# Altium PCB CAN Hub1.PcbDoc
Units mil, origin at the board's own origin, x right, y up, seen from the top; angles counter-clockwise.
Board outline 6000 x 4000 mil, 2 copper layers (Top Layer, Bottom Layer); 8 components, 4 nets, 32 pads, 0 vias.
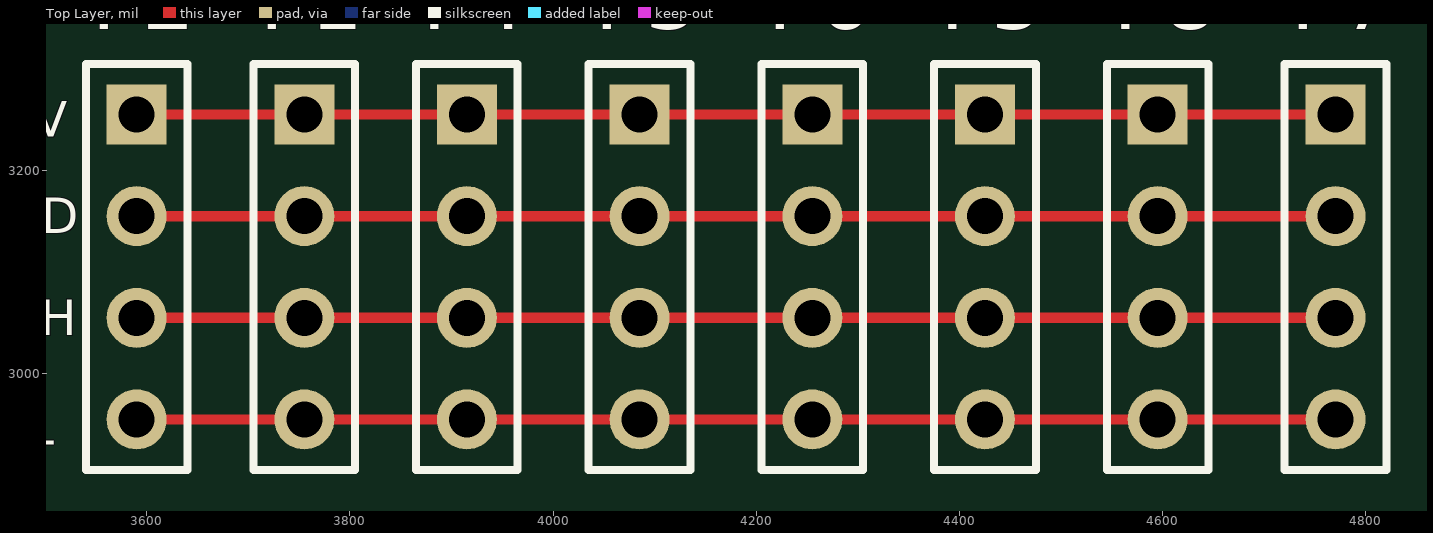
[diagram p0: Top Layer view]
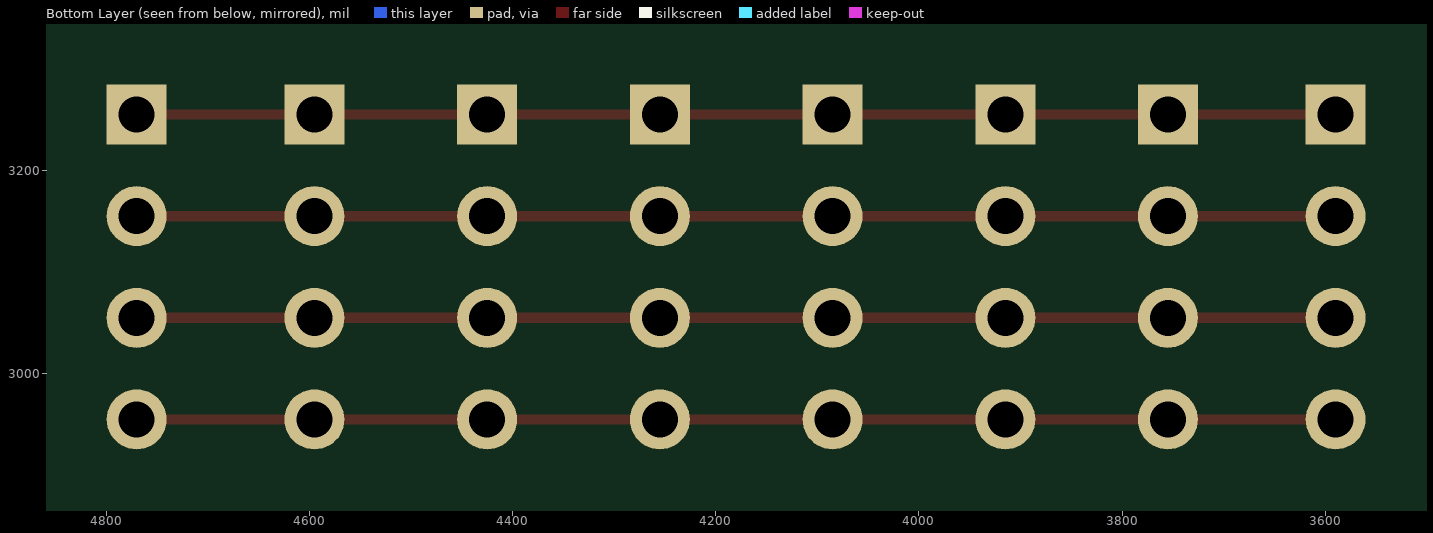
[diagram p1: Bottom Layer view, seen from below]
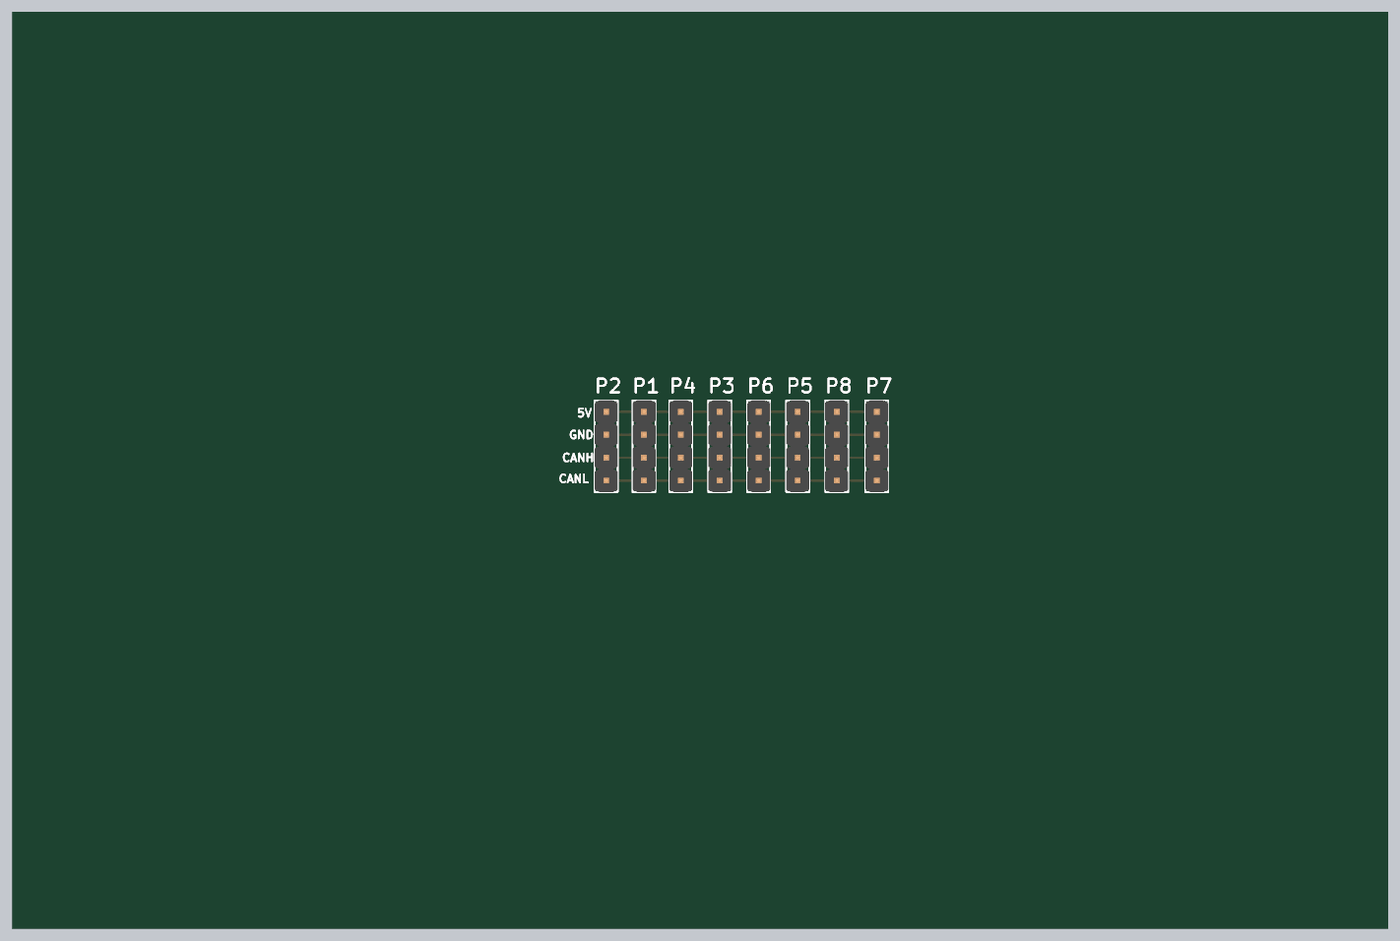
[diagram p2: 3D render of the assembled board from above, using the file's embedded part models]

## Layer stack, top to bottom
Top Solder: solder mask 0.4, Solder Resist, Dk 3.5
Top Layer: signal copper 1.4
Dielectric 1: dielectric 12.6, FR-4, Dk 4.8
Bottom Layer: signal copper 1.4
Bottom Solder: solder mask 0.4, Solder Resist, Dk 3.5

## Board outline
1000,1000 7000,1000 7000,5000 1000,5000

## Design rules (kind name [scope] priority, off if disabled: settings)
Clearance [All] p1: gap=10 ignorepadtopadclearanceinfootprint=FALSE except(0: Arc-Hole Track-Hole SMDPad-Hole THPad-Hole Via-Hole Fill-Hole Poly-Hole Region-Hole Text-Hole)
PolygonConnect [All] p1: connectstyle=Relief reliefconductorwidth=10 reliefentries=4 polygonreliefangle="90 Angle" airgapwidth=10
RoutingVias [All] p1: holewidth=28 width=50 viastyle="Through Hole" minholewidth=28 minwidth=50 maxholewidth=28 maxwidth=50
SolderMaskExpansion [All] p1: expansion=4 istentingtop=FALSE
Width [All] p1: maxlimit=10 minlimit=10 preferedwidth=10
30 further rules are at their usual default settings.

## Components (designator, comment, footprint, x,y, rotation, side; value= is the part's Value field where it differs from the comment)
P1 "1x4 Header" HDR1X4 3755,3255 r270 top
P2 "1x4 Header" HDR1X4 3590,3255 r270 top
P3 "1x4 Header" HDR1X4 4085,3255 r270 top
P4 "1x4 Header" HDR1X4 3915,3255 r270 top
P5 "1x4 Header" HDR1X4 4425,3255 r270 top
P6 "1x4 Header" HDR1X4 4255,3255 r270 top
P7 "1x4 Header" HDR1X4 4770,3255 r270 top
P8 "1x4 Header" HDR1X4 4595,3255 r270 top

## Footprints (in the part's own frame and the unit in brackets; to place one, negate y for a bottom-side part, rotate by r counter-clockwise, add the part's x,y. Pads: shape width x height; smd on the part's side, far side on the other; paste and mask are expansions set on the pad)
HDR1X4 [mm] "Connector; Header; 4 Position"
  rect 1.5x1.5 hole 0.9: 1(0,0)
  round 1.5 hole 0.9: 2(2.54,0) 3(5.08,0) 4(7.62,0)
  silkscreen extent -1.27,-1.27 8.89,1.27, body extent -1.27,-1.27 8.89,1.27, height 8.54

## Part data
P1 P2 P3 P4 P5 P6 P7 P8: "1x4 Pin Header"

## Nets (pads, with @x,y where several pads share a name; then routed paths per layer and width w, separated by ;. In a path a pad name is that pad's centre, name@x,y a point inside that pad or via, vN(x,y) a via of type N, cw(c..) or ccw(c..) an arc to the next point about the centre after c; other vN are vias at no path point)
5V: P1.1 P2.1 P3.1 P4.1 P5.1 P6.1 P7.1 P8.1 | length 1180
  Top Layer w10: P2.1 P1.1 P4.1 P3.1 P6.1 P5.1 P8.1 P7.1
CANH: P1.3 P2.3 P3.3 P4.3 P5.3 P6.3 P7.3 P8.3 | length 1180
  Top Layer w10: P2.3 P1.3 P4.3 P3.3 P6.3 P5.3 P8.3 P7.3
CANL: P1.4 P2.4 P3.4 P4.4 P5.4 P6.4 P7.4 P8.4 | length 1180
  Top Layer w10: P2.4 P1.4 P4.4 P3.4 P6.4 P5.4 P8.4 P7.4
GND: P1.2 P2.2 P3.2 P4.2 P5.2 P6.2 P7.2 P8.2 | length 1180
  Top Layer w10: P2.2 P1.2 P4.2 P3.2 P6.2 P5.2 P8.2 P7.2

## Silkscreen, mask and mechanical layers (free items; w line width, h text height)
Top Overlay:
  text "5V" at 3458,3233 h35
  text "GND" at 3423,3138 h35
  text "CANH" at 3393,3038 h35
  text "CANL" at 3380,2930 h35